# EAGLE board Arduino Módulo B - Dev.log (EAGLE 9.7.0)

Size 182.75 x 154.97 mm. Coordinates in mm from the lower left corner, seen from the top.
Outline: 0,0 182.75,0 182.75,154.97 0,154.97 0,0
Copper layers (1*16): Top 0.035mm / dielectric 1.5mm / Bottom 0.035mm
Design rules "default": minimum track width 6mil, minimum drill 0.35mm, track to track 6mil, track to pad 6mil, pad to pad 6mil, via to via 6mil, smd to smd 6mil, copper to edge 40mil, drill to drill 6mil, minimum pad ring 10mil, minimum via ring 8mil, stop-mask expansion 4mil, vias tented up to drill 0mil, thermal gap 10mil

## Footprints (pad centres in the part's own frame; a part is rotated, then mirrored left to right if it is on the bottom)
LEDRD254W60D565H860B = drill 0.981 pad 1.581: 1 -1.27,0; 2 1.27,0
LEDRD254W60D565H860B_G = drill 0.981 pad 1.581: 1 -1.27,0; 2 1.27,0
1X08 = drill 1.016 long: 1 -8.89,0; 2 -6.35,0; 3 -3.81,0; 4 -1.27,0; 5 1.27,0; 6 3.81,0; 7 6.35,0; 8 8.89,0
MOTOR = drill 1.118 pad 3.15 octagon: + 2.54,0; - -2.54,0
RESAD1016W63L850D250B = drill 0.83 pad 1.43: 1 -5.08,0; 2 5.08,0
SWITCH-MOMENTARY-PTH-6.5MM = drill 1.016 pad 1.88: 1 -3.251,2.261; 2 3.251,2.261; 3 -3.251,-2.261; 4 3.251,-2.261
LCD-I2C = drill 1.016 long: 1 -19.05,-5.08; 2 -19.05,-7.62; 3 -19.05,-10.16; 4 -19.05,-12.7
ARDUINO-UNO-R3-SHIELD = drill 1.016 pad 1.88: 3.3V 24.13,-2.54; 5V 24.13,0; A0 24.13,12.7; A1 24.13,15.24; A2 24.13,17.78; A3 24.13,20.32; A4 24.13,22.86; A5 24.13,25.4; AREF -24.13,-13.97; D2 -24.13,20.32; D3 -24.13,17.78; D4 -24.13,15.24; D5 -24.13,12.7; D6 -24.13,10.16; D7 -24.13,7.62; D8 -24.13,3.81; D9 -24.13,1.27; D10 -24.13,-1.27; D11 -24.13,-3.81; D12 -24.13,-6.35; D13 -24.13,-8.89; GND@0 24.13,2.54; GND@1 24.13,5.08; GND@2 -24.13,-11.43; IOREF 24.13,-7.62; NC 24.13,-10.16; RES 24.13,-5.08; RX -24.13,25.4; SCL -24.13,-19.05; SDA -24.13,-16.51; TX -24.13,22.86; VIN 24.13,7.62
DIP762W53P254L1969H508Q16B = drill 0.743 pad 1.343: 1 -3.81,8.89; 2 -3.81,6.35; 3 -3.81,3.81; 4 -3.81,1.27; 5 -3.81,-1.27; 6 -3.81,-3.81; 7 -3.81,-6.35; 8 -3.81,-8.89; 9 3.81,-8.89; 10 3.81,-6.35; 11 3.81,-3.81; 12 3.81,-1.27; 13 3.81,1.27; 14 3.81,3.81; 15 3.81,6.35; 16 3.81,8.89

## Placement (x,y rotation side)
D1  RED  [LEDRD254W60D565H860B]  61.37,98.12 180 top
D2  GREEN  [LEDRD254W60D565H860B_G]  67.15,98.2 180 top
KEYPAD1  KEYPAD-4X4  [1X08]  126.06,73.08 0 top
M1  MOTOR_HDR  [MOTOR]  174.5,91.57 0 top
R2  300  [RESAD1016W63L850D250B]  60.1,93.04 90 top
R3  300  [RESAD1016W63L850D250B]  65.88,93.12 90 top
S1  SWITCH_MOMENTARY  [SWITCH-MOMENTARY-PTH-6.5MM]  83.48,102.73 90 top
U4  LCD-16X2-I2CSUNFOUNDER-IIC  [LCD-I2C]  35.9,147.43 0 top
U5  ARDUINO-UNO-R3-SHIELD  [ARDUINO-UNO-R3-SHIELD]  47.88,29.84 270 top
U6  L293E  [DIP762W53P254L1969H508Q16B]  123.83,29.5 90 top

## Library data of the parts
D1 = Tinkercad; CATEGORY: Opto-Electronic; SUB-CATEGORY: LED; VALUE: LED_RED
D2 = Tinkercad; CATEGORY: Opto-Electronic; SUB-CATEGORY: LED; VALUE: LED_GREEN
KEYPAD1 M1 R2 R3 S1 U4-U6 = Tinkercad

## Nets
D1_C: D1.2 R2.2
D2_C: D2.2 R3.2
M1_+: M1.+ U6.3
M1_-: M1.- U6.6
U5_5V: U4.2 U5.5V U6.8 U6.16
U5_A3: S1.2 U5.A3
U5_A4: U4.3 U5.A4
U5_A5: U4.4 U5.A5
U5_D2: D2.1 U5.D2
U5_D3: D1.1 U5.D3
U5_D4: U5.D4 U6.1
U5_D5: U5.D5 U6.2
U5_D6: KEYPAD1.1 U5.D6
U5_D7: KEYPAD1.2 U5.D7
U5_D8: KEYPAD1.3 U5.D8
U5_D9: KEYPAD1.4 U5.D9
U5_D10: KEYPAD1.5 U5.D10
U5_D11: KEYPAD1.6 U5.D11
U5_D12: KEYPAD1.7 U5.D12
U5_D13: KEYPAD1.8 U5.D13
U5_GND: R2.1 R3.1 S1.4 U4.1 U5.GND@0 U5.GND@1 U5.GND@2 U6.4 U6.5 U6.12 U6.13

## Tracks (layer width: path | path; a pad name or v marks a point on that pad's centre or on a via)
D1_C  (1 unrouted)
D2_C  (1 unrouted)
M1_+  (1 unrouted)
M1_-  (1 unrouted)
U5_5V  (3 unrouted)
U5_A3  (1 unrouted)
U5_A4  (1 unrouted)
U5_A5  (1 unrouted)
U5_D2  (1 unrouted)
U5_D3  (1 unrouted)
U5_D4  (1 unrouted)
U5_D5  (1 unrouted)
U5_D6  (1 unrouted)
U5_D7  (1 unrouted)
U5_D8  (1 unrouted)
U5_D9  (1 unrouted)
U5_D10  (1 unrouted)
U5_D11  (1 unrouted)
U5_D12  (1 unrouted)
U5_D13  (1 unrouted)
U5_GND  (10 unrouted)